# Altium PCB 0.66寸oled.PcbDoc
Units mil, origin at the board's own origin, x right, y up, seen from the top; angles counter-clockwise.
Board outline 753 x 884 mil, 2 copper layers (Top Layer, Bottom Layer); 13 components, 15 nets, 62 pads, 49 vias.
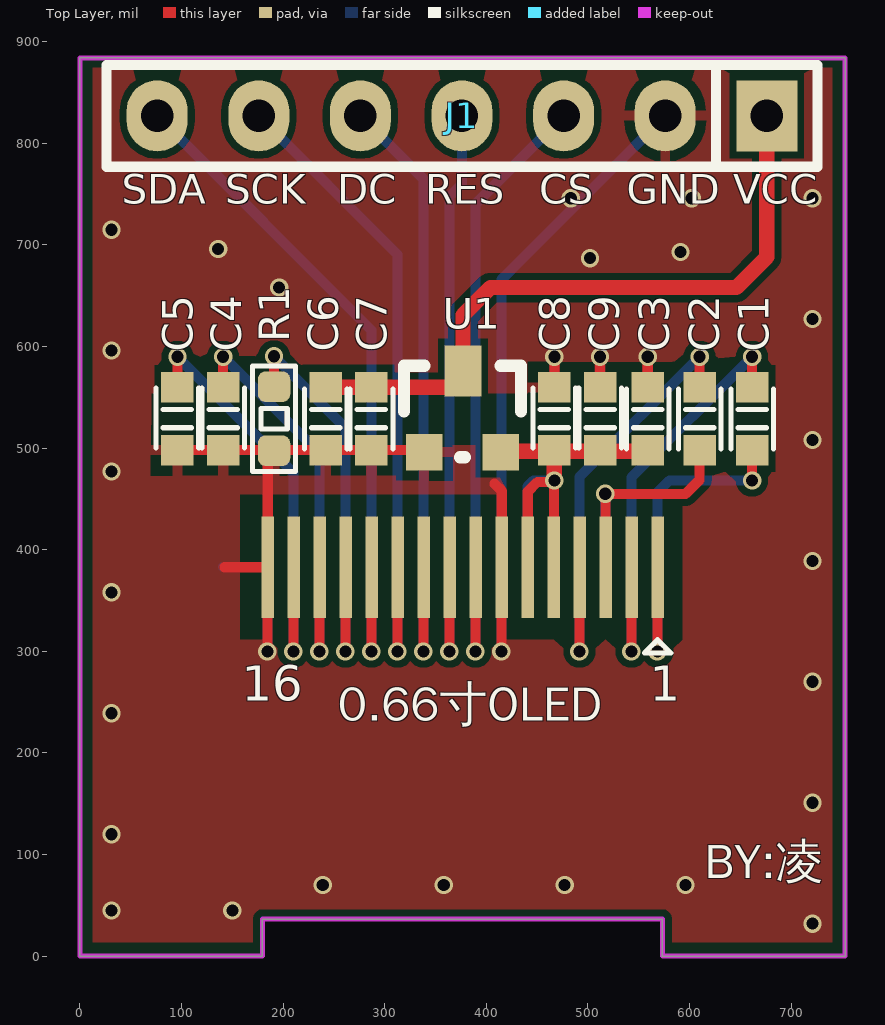
[diagram p0: Top Layer view]
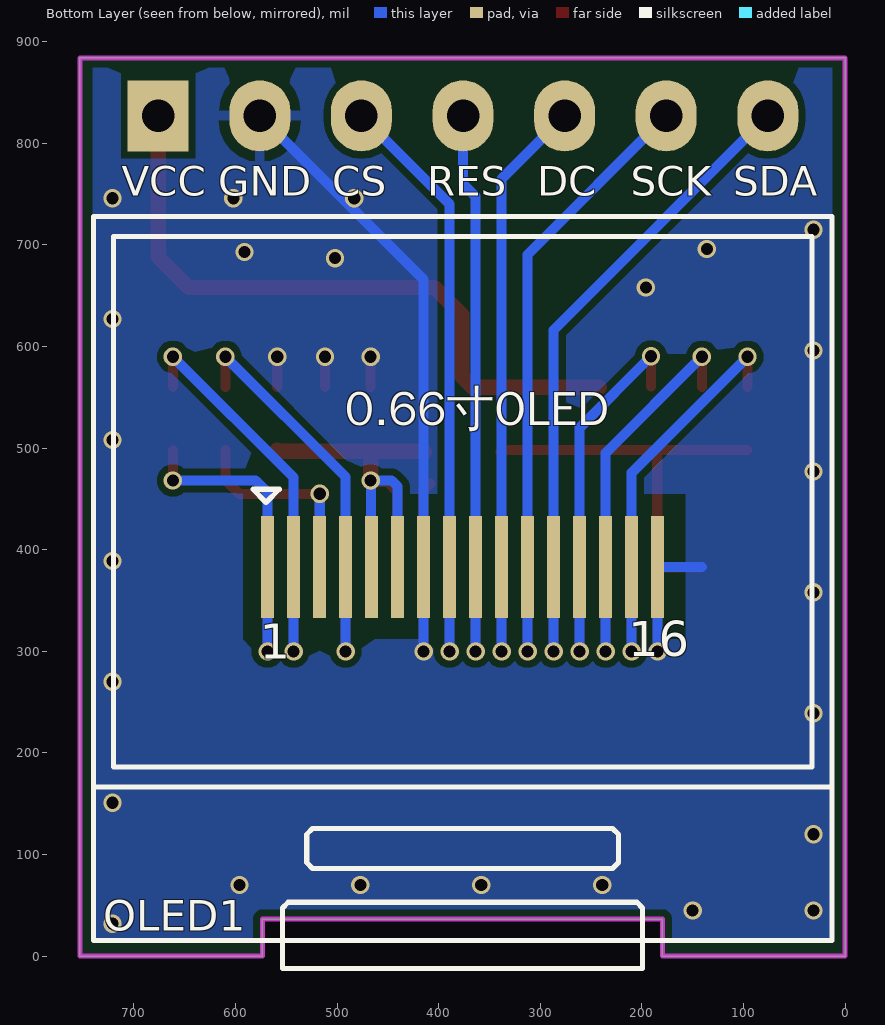
[diagram p1: Bottom Layer view, seen from below]

## Layer stack, top to bottom
Top Solder: solder mask 0.4, Solder Resist, Dk 3.5
Top Layer: signal copper 1.4
Dielectric 1: dielectric 12.6, FR-4, Dk 4.8
Bottom Layer: signal copper 1.4
Bottom Solder: solder mask 0.4, Solder Resist, Dk 3.5

## Board outline
0,0 0,884 753,884 753,0 573.35,0 573.35,36.5 179.65,36.5 179.65,0

## Design rules (kind name [scope] priority, off if disabled: settings)
Clearance [All] p1: gap=7 ignorepadtopadclearanceinfootprint=TRUE
ComponentClearance [All] p1: gap=0 collisioncheckmode=3 verticalgap=0 showdistances=FALSE
HoleToHoleClearance [All] p1: gap=4 allowstackedmicrovias=TRUE
MinimumSolderMaskSliver [All] p1: minsoldermaskwidth=4
PlaneConnect [All] p1: pad.planeconnectstyle=Relief pad.reliefexpansion=20 pad.reliefentries=4 pad.reliefconductorwidth=10 pad.reliefairgap=10 via.planeconnectstyle=Direct via.reliefexpansion=20 via.reliefentries=4 via.reliefconductorwidth=10 via.reliefairgap=10
PolygonConnect [All] p1: thpad.connectstyle=Relief thpad.reliefconductorwidth=10 thpad.reliefentries=4 thpad.polygonreliefangle="90 Angle" thpad.airgapwidth=10 smdpad.connectstyle=Relief smdpad.reliefconductorwidth=10 smdpad.reliefentries=4 smdpad.polygonreliefangle="90 Angle" smdpad.airgapwidth=10 via.connectstyle=Direct via.reliefconductorwidth=10 via.reliefentries=4 via.polygonreliefangle="90 Angle" via.airgapwidth=10
RoutingVias [All] p1: holewidth=28 width=50 viastyle="Through Hole" minholewidth=12 minwidth=18 maxholewidth=28 maxwidth=50
SilkToSilkClearance [All] p1: silktosilkclearance=0
SilkToSolderMaskClearance [IsPad] p1: minsilkscreentomaskgap=0 clearancetoexposedcopper=TRUE
SolderMaskExpansion [All] p1: expansion=4 istentingtop=FALSE
Width [All] p1: maxlimit=50 minlimit=7 preferedwidth=10
24 further rules are at their usual default settings.

## Components (designator, comment, footprint, x,y, rotation, side; value= is the part's Value field where it differs from the comment)
C1 "1uF" 0603-C 661.59,529.02 r270 top
C2 "1uF" 0603-C 609.9,529.02 r270 top
C3 "4.7uF" 0603-C 558.9,529.02 r270 top
C4 "4.7uF" 0603-C 140.9,529.02 r90 top
C5 "2.2uF" 0603-C 95.9,529.02 r90 top
C6 "106" 0603-C 241.9,529.02 r270 top
C7 "104" 0603-C 286.9,529.02 r270 top
C8 "104" 0603-C 466.9,529.02 r90 top
C9 "106" 0603-C 511.9,529.02 r90 top
J1 "2.54*1*7" "Pin HDR1X7/2.54mm-S" 676,827 r270 top
OLED1 "0.66寸OLED" 0.66OLED-W 376.39,383 r180 bottom
R1 "390K" 0603-R 191,529 r270 top
U1 "SC662K-3.3V" SOT-23 374,531 r0 top

## Footprints (in the part's own frame and the unit in brackets; to place one, negate y for a bottom-side part, rotate by r counter-clockwise, add the part's x,y. Pads: shape width x height; smd on the part's side, far side on the other; paste and mask are expansions set on the pad)
0.66OLED-W [mm]
  rect 0.32x2.54 smd: 1(-4.875,0) 2(-4.225,0) 3(-3.575,0) 4(-2.925,0) 5(-2.275,0) 6(-1.625,0) 7(-0.975,0) 8(-0.325,0) 9(0.325,0) 10(0.975,0) 11(1.625,0) 12(2.275,0) 13(2.925,0) 14(3.575,0) 15(4.225,0) 16(4.875,0)
  silkscreen extent -9.23,-10.03 9.23,8.76, body extent -9.23,-10.03 9.23,8.76, height 1.41
0603-C [mil] "Murata & TDK 0603,25V,±10%,X7R,SERAMIC"
  rect 30x32 smd mask+2: 1(-31,0) 2(31,0)
  silkscreen extent -29,-21 30,21, body extent -46,-16 46,16, height 31
0603-R [mil]
  rrect50% 30x32 smd mask+2: 1(-31.5,0) 2(31.5,0)
  silkscreen extent -52,-21 52,21, body extent -31,-16 32,16, height 18
"Pin HDR1X7/2.54mm-S" [mil]
  rect 70x60 hole 32: 1(0,0)
  oval 70x60 hole 32: 2(0,-100) 3(0,-200) 4(0,-300) 5(0,-400) 6(0,-500) 7(0,-600)
  silkscreen extent -50,-650 50,50, body extent -50,-650 50,50, height 336
SOT-23 [mil]
  rect 36x36 smd: 1(-35,-35) 2(40,-35)
  rect 36x50 smd: 3(3,45)
  silkscreen extent -55,-40 60,50, body extent -54,-48 60,62, height 47

## Part data
C1 C2 C3 C4 C5 C6 C7 C8 C9: library part CAP, "无极性电容"
J1: library part "Pin HDR1X7"
R1: library part RES
U1: library part AMS1117, "三端稳压芯片"

## Free pads (board coordinates)
  rect 12.6x100 smd: 1(568.61,382.77) 2(543.02,382.77) 3(517.43,382.77) 4(491.84,382.77) 5(466.25,382.77) 6(440.66,382.77) 7(415.07,382.77) 8(389.48,382.77) 9(363.89,382.77) 10(338.29,382.77) 11(312.7,382.77) 12(287.11,382.77) 13(261.52,382.77) 14(235.93,382.77) 15(210.34,382.77) 16(184.75,382.77)

## Via types
v1: diameter 18, hole 12, Top Layer to Bottom Layer, tented both sides, 49 vias

## Nets (pads, with @x,y where several pads share a name; then routed paths per layer and width w, separated by ;. In a path a pad name is that pad's centre, name@x,y a point inside that pad or via, vN(x,y) a via of type N, cw(c..) or ccw(c..) an arc to the next point about the centre after c; other vN are vias at no path point)
3V3: C3.2 C8.1 C9.1 OLED1.5 OLED1.6 pad.5 pad.6 U1.2 | length 559.7
  Top Layer w10: pad.6 440.66,457.04 450.22,466.61 465.37,466.61 v1(466.9,468.14) ; pad.5 466.58,383.1 v1@466.58,467.81 ; C8.1@466.9,497.01 C8.1
  Top Layer w15: U1.2 415.01,497.01 C8.1@466.9,497.01 ; v1(466.9,468.14) C8.1@466.9,497.01 ; C3.2 557.89,497.01 C8.1@466.9,497.01
  Bottom Layer w10: OLED1.6 440.36,462.28 446.22,468.14 v1(466.9,468.14) 466.43,467.66 466.43,383.48 OLED1.5
CS#: J1.3 OLED1.8 pad.8 | length 646
  Top Layer w10: v1(389.18,299.92) 389.33,300.07 389.33,382.63 pad.8
  Bottom Layer w10: v1(389.18,299.92) OLED1.8 389.18,740.18 J1.3
D/C#: J1.5 OLED1.10 pad.10 | length 635.7
  Top Layer w10: v1(338,299.92) 338.15,300.07 338.15,382.63 pad.10
  Bottom Layer w10: J1.5 338,765 OLED1.10 v1(338,299.92)
GND: C3.1 C4.1 C5.1 C6.2 C7.2 C8.2 C9.2 J1.2 OLED1.7 OLED1.16 pad.7 pad.16 R1.2 U1.1 | length 1464.9
  Top Layer w10: C5.1 C4.1 C6.2 C7.2 336.98,498.02 U1.1 ; 142.23,382.77 pad.16 ; v1(184.46,299.92) 184.6,300.07 184.6,382.63 pad.16 ; R1.2 184.75,491.26 pad.16 ; 408,465 415.07,457.93 pad.7 414.92,382.63 414.92,300.07 v1(414.77,299.92) ; C8.2 v1(466.9,589.9) ; C9.2 v1(511.9,589.9) ; C3.1 v1(558.9,589.9)
  Bottom Layer w10: 141,383 OLED1.16 v1(184.46,299.92) ; v1(414.77,299.92) OLED1.7 414.77,665.77 J1.2
  other v1: 721,32 31,45 150,45 239,70 358,70 477,70 596,70 31,120 721,151 31,239 721,270 31,358 721,389 31,477 721,508 31,596 721,627 196,658 502,687 591,693 136,696 31,715 483,746 602,746 721,746
NetC1_1: C1.1 OLED1.2 pad.2 | length 452.1
  Top Layer w10: v1(542.72,299.92) 542.87,300.07 542.87,382.63 pad.2 ; C1.1 v1(661.59,589.9)
  Bottom Layer w10: v1(542.72,299.92) OLED1.2 542.72,471.04 v1(661.59,589.9)
NetC1_2: C1.2 OLED1.1 pad.1 | length 367.4
  Top Layer w10: v1(568.32,299.92) 568.46,300.07 568.46,382.63 pad.1 ; v1(661.59,468.14) C1.2
  Bottom Layer w10: v1(568.32,299.92) OLED1.1 568.32,456.32 580.14,468.14 v1(661.59,468.14)
NetC2_1: C2.1 OLED1.4 pad.4 | length 451.9
  Top Layer w10: v1(491.54,299.92) 491.69,300.07 491.69,382.63 pad.4 ; C2.1 v1(609.9,589.9)
  Bottom Layer w10: v1(491.54,299.92) OLED1.4 491.54,471.54 v1(609.9,589.9)
NetC2_2: C2.2 OLED1.3 pad.3 | length 272.3
  Top Layer w10: pad.3 517.21,382.99 517.21,454.79 v1(517,455) 596.15,455 609.9,468.75 C2.2
  Bottom Layer w10: v1(517,455) 517.07,454.93 517.07,383.07 OLED1.3
NetC4_2: C4.2 OLED1.14 pad.14 | length 442.1
  Top Layer w10: C4.2 v1(140.9,589.9) ; v1(235.64,299.92) 235.78,300.07 235.78,382.63 pad.14
  Bottom Layer w10: v1(140.9,589.9) 235.64,495.17 OLED1.14 v1(235.64,299.92)
NetC5_2: C5.2 OLED1.15 pad.15 | length 450.1
  Top Layer w10: C5.2 v1(95.9,589.9) ; v1(210.05,299.92) 210.19,300.07 210.19,382.63 pad.15
  Bottom Layer w10: v1(95.9,589.9) 210.05,475.76 OLED1.15 v1(210.05,299.92)
NetOLED1_13: OLED1.13 pad.13 R1.1 | length 432.4
  Top Layer w10: R1.1 v1(191,590.38) ; v1(261.23,299.92) 261.38,300.07 261.38,382.63 pad.13
  Bottom Layer w10: v1(191,590.38) 261.23,520.15 OLED1.13 v1(261.23,299.92)
RES#: J1.4 OLED1.9 pad.9 | length 615.2
  Top Layer w10: v1(363.59,299.92) 363.74,300.07 363.74,382.63 pad.9
  Bottom Layer w10: v1(363.59,299.92) OLED1.9 363.8,383.2 363.8,748 376,760.2 J1.4
SCLK: J1.6 OLED1.11 pad.11 | length 666.6
  Top Layer w10: v1(312.41,299.92) 312.56,300.07 312.56,382.63 pad.11
  Bottom Layer w10: J1.6 312.41,690.59 OLED1.11 v1(312.41,299.92)
SDIN: J1.7 OLED1.12 pad.12 | length 697.4
  Top Layer w10: v1(286.82,299.92) 286.97,300.07 286.97,382.63 pad.12
  Bottom Layer w10: J1.7 286.82,616.18 OLED1.12 v1(286.82,299.92)
VCC: C6.1 C7.1 J1.1 U1.3 | length 661.5
  Top Layer w15: C6.1 C7.1 366.5,560.02 377,570.52 U1.3 377,631 404,658 646,658 676,688 J1.1

## Polygon pours and split planes (outlines as drawn)
GND on Top Layer "NONET_L-01_P-001" (solid, remove dead copper, pour order 0): 3,4 3,884 750,884 750,4 573.35,4 573.35,36.5 179.65,36.5 179.65,4
GND on Bottom Layer "NONET_L-01_P-001" (solid, remove dead copper, pour order 1): 3,4 3,884 750,884 750,4 573.35,4 573.35,36.5 179.65,36.5 179.65,4

## Keep-outs
Keep-Out Layer:
  the board outline again, w5

## Other copper
Top Layer:
  pour cut-out: 70,503 684.59,503 684.59,554 70,554
  pour cut-out: 157.15,311.63 593.15,311.63 593.15,454.63 157.15,454.63
Bottom Layer:
  pour cut-out: 157,312 593,312 593,455 157,455

## Silkscreen, mask and mechanical layers (free items; w line width, h text height)
Top Overlay:
  lines w5: 555.5,298.5 581.5,298.5 568.5,311.5 555.5,298.5
  text "SDA" at 41,730.51 h50
  text "SCK" at 143,730.51 h50
  text "DC" at 253,730.51 h50
  text "RES" at 340,730.51 h50
  text "CS" at 452,730.51 h50
  text "GND" at 538,730.51 h50
  text "VCC" at 643.05,730.51 h50
  text "16" at 159,240 h59.06
  text "1" at 561,240 h59.06
  text "0.66寸OLED" at 254,220.3 h59.06
  text "BY:凌" at 615,65.3 h59.06
Bottom Overlay:
  text "SDA" at 110,738.51 h50
  text "SCK" at 211,738.51 h50
  text "DC" at 302.74,738.51 h50
  text "RES" at 411,738.51 h50
  text "CS" at 504.67,738.51 h50
  text "GND" at 617,738.51 h50
  text "VCC" at 711.95,738.51 h50
  text "0.66寸OLED" at 492,511.3 h59.06

## Text inside footprints (layer, text, board x,y; h text height)
OLED1: Bottom Overlay "16" at 213.32,283.6 h59.06; Bottom Overlay "1" at 576.22,281.27 h59.06